# Altium PCB XEM7310_Breakout.PcbDoc (part 3 of 3)
Units mm, origin at the board's own origin, x right, y up, seen from the top; angles counter-clockwise.
Board outline 151.89 x 165.35 mm, 4 copper layers (Top, Ground Plane, Power Plane, Bottom), stack 1.562 mm thick; 68 components, 204 nets, 832 pads, 382 vias.
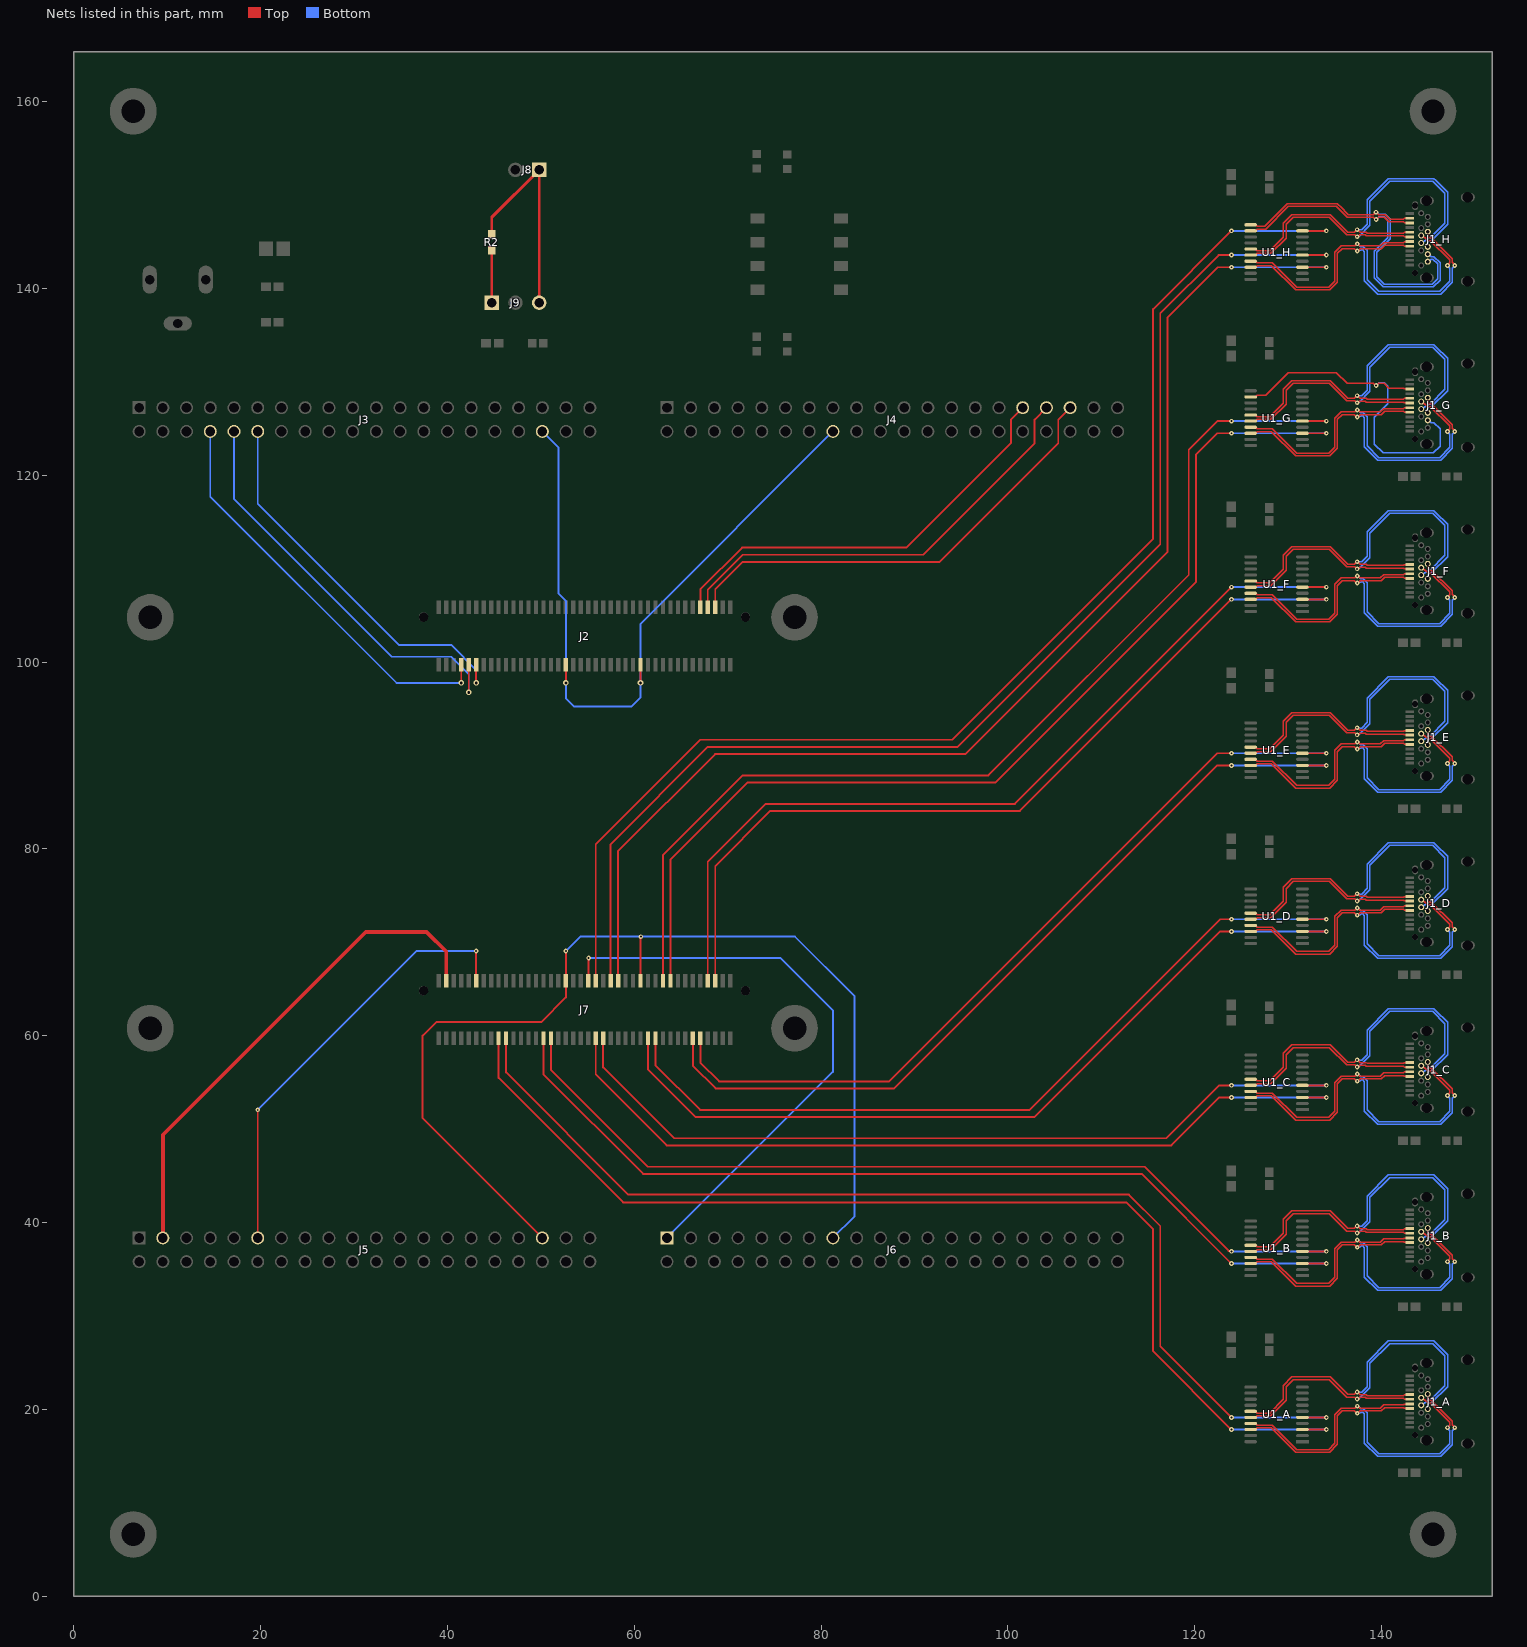
[diagram p5: the nets of this part, all layers, seen from the top]

## Via types
v1: diameter 0.508, hole 0.203, Top to Bottom, 190 vias
v2: diameter 0.61, hole 0.305, Top to Bottom, 154 vias
v3: diameter 0.813, hole 0.406, Top to Bottom, 38 vias

## Nets (pads, with @x,y where several pads share a name; then routed paths per layer and width w, separated by ;. In a path a pad name is that pad's centre, name@x,y a point inside that pad or via, vN(x,y) a via of type N, cw(c..) or ccw(c..) an arc to the next point about the centre after c; other vN are vias at no path point) (continued)
MISO_G_P: J1_G.A10 J1_G.B10 U1_G.12 | length 38.6
  Top w0.16: U1_G.12@126.003,128.414 126.559,128.414 126.74,128.596 127.632,128.596 130.06,131.024 135.179,131.024 136.34,129.863 139.152,129.863 139.375,129.639 v1(139.449,129.639) ; v1@139.451,129.652 139.526,129.652 139.738,129.864 140.309,129.864 140.808,129.364 142.384,129.364 142.475,129.274 143.047,129.274 J1_G.A10@143.063,129.258
  Bottom w0.16: v1(139.449,129.639) 139.489,129.639 139.758,129.908 140.295,129.908 140.67,129.533 140.67,127.684 139.239,126.253 139.239,123.364 140.195,122.408 145.575,122.408 146.304,123.138 146.304,124.982 145.635,125.652 145.361,125.652 145.105,125.908 J1_G.B10@144.973,125.908
MISO_H1: J7.43 U1_H.9 | length 137
  Top w0.203: J7.43@55.877,65.888 55.877,80.515 67.056,91.694 94.041,91.694 115.57,113.223 115.57,137.812 v1(123.952,146.194) ; U1_H.9@131.553,146.194 v1(134.112,146.194)
  Bottom w0.203: v1(123.952,146.194) v1(134.112,146.194)
MISO_H2: J6.01 J7.41 | length 62.7
  Top w0.203: J7.41@55.077,65.888 55.098,65.909 55.098,68.306 v1(55.118,68.326)
  Bottom w0.203: v1(55.118,68.326) 75.692,68.326 81.28,62.738 81.28,56.134 J6.01@63.5,38.354
MISO_H_N: J1_H.A11 J1_H.B11 U1_H.11 | length 37.8
  Top w0.16: U1_H.11@126.003,146.844 126.559,146.844 126.74,146.663 127.513,146.663 129.941,149.091 135.298,149.091 135.466,148.923 135.585,148.804 136.459,147.93 139.128,147.93 139.392,148.193 v1(139.432,148.193) ; v1@139.446,148.143 139.526,148.143 139.738,147.931 140.428,147.931 140.927,147.432 142.384,147.432 142.475,147.522 143.047,147.522 J1_H.A11@143.063,147.538
  Bottom w0.16: v1(139.432,148.193) 139.476,148.193 v1@139.526,148.143 ; v1@139.433,148.161 139.549,148.161 139.734,147.975 140.414,147.975 140.957,147.432 140.957,145.345 139.526,143.914 139.526,141.263 140.314,140.476 145.456,140.476 146.017,141.037 146.017,142.643 145.516,143.144 145.361,143.144 145.105,142.888 J1_H.B11@144.973,142.888
MISO_H_P: J1_H.A10 J1_H.B10 U1_H.12 | length 38.6
  Top w0.16: U1_H.12@126.003,146.194 126.559,146.194 126.74,146.376 127.632,146.376 130.06,148.804 135.179,148.804 136.34,147.643 139.152,147.643 139.375,147.419 v1(139.449,147.419) ; v1@139.451,147.432 139.526,147.432 139.738,147.644 140.309,147.644 140.808,147.144 142.384,147.144 142.475,147.054 143.047,147.054 J1_H.A10@143.063,147.038
  Bottom w0.16: v1(139.449,147.419) 139.489,147.419 139.758,147.688 140.295,147.688 140.67,147.313 140.67,145.464 139.239,144.033 139.239,141.144 140.195,140.188 145.575,140.188 146.304,140.918 146.304,142.762 145.635,143.432 145.361,143.432 145.105,143.688 J1_H.B10@144.973,143.688
MOSI_A: J7.20 U1_A.5 | length 116.9
  Top w0.203: J7.20@46.277,59.716 46.277,56.085 59.36,43.002 112.96,43.002 116.332,39.63 116.332,26.754 v1(123.952,19.134) ; U1_A.5@131.553,19.134 v1(134.112,19.134)
  Bottom w0.203: v1(123.952,19.134) v1(134.112,19.134)
MOSI_A_N: J1_A.A8 J1_A.B8 U1_A.15 | length 41.7
  Top w0.16: U1_A.15@126.003,19.784 126.559,19.784 126.74,19.603 128.044,19.603 129.507,21.065 129.507,22.547 130.431,23.471 134.557,23.471 136.43,21.598 137.08,21.598 137.345,21.863 137.484,21.863 137.77,21.577 138.396,21.577 138.501,21.472 142.384,21.472 142.475,21.562 143.047,21.562 J1_A.A8@143.063,21.578
  Bottom w0.16: v1(137.414,21.863) 137.443,21.834 137.883,21.834 138.481,22.432 138.481,25.048 140.763,27.33 145.635,27.33 145.838,27.127 147.099,25.866 147.099,22.416 145.365,20.682 145.13,20.682 144.947,20.499 144.947,20.054 J1_A.B8@144.973,20.028
MOSI_A_P: J1_A.A7 J1_A.B7 U1_A.16 | length 41.2
  Top w0.16: U1_A.16@126.003,19.134 126.559,19.134 126.74,19.316 128.163,19.316 129.794,20.946 129.794,22.428 130.55,23.184 134.439,23.184 136.312,21.311 137.135,21.311 137.344,21.101 137.509,21.101 137.647,21.239 137.655,21.239 137.706,21.29 138.277,21.29 138.382,21.184 142.384,21.184 142.475,21.094 143.047,21.094 J1_A.A7@143.063,21.078
  Bottom w0.16: v1(137.415,21.101) 137.509,21.101 137.634,21.227 137.681,21.227 138.768,22.313 138.768,24.929 140.882,27.043 145.516,27.043 146.812,25.747 146.812,22.535 145.246,20.969 145.011,20.969 144.729,20.687 144.665,20.687 144.406,20.428 J1_A.B7@144.273,20.428
MOSI_B: J7.32 U1_B.5 | length 97
  Top w0.203: J7.32@51.077,59.716 51.077,56.365 61.468,45.974 114.653,45.974 123.654,36.973 123.894,36.973 v1(123.952,36.914) ; U1_B.5@131.553,36.914 v1(134.112,36.914)
  Bottom w0.203: v1(123.952,36.914) v1(134.112,36.914)
MOSI_B_N: J1_B.A8 J1_B.B8 U1_B.15 | length 41.7
  Top w0.16: U1_B.15@126.003,37.564 126.559,37.564 126.74,37.383 128.044,37.383 129.507,38.845 129.507,40.327 130.431,41.251 134.557,41.251 136.43,39.378 137.08,39.378 137.345,39.643 137.484,39.643 137.77,39.357 138.396,39.357 138.501,39.252 142.384,39.252 142.475,39.342 143.047,39.342 J1_B.A8@143.063,39.358
  Bottom w0.16: v1(137.414,39.643) 137.443,39.614 137.883,39.614 138.481,40.212 138.481,42.828 140.763,45.11 145.635,45.11 145.838,44.907 147.099,43.646 147.099,40.196 145.365,38.462 145.13,38.462 144.947,38.279 144.947,37.834 J1_B.B8@144.973,37.808
MOSI_B_P: J1_B.A7 J1_B.B7 U1_B.16 | length 41.2
  Top w0.16: U1_B.16@126.003,36.914 126.559,36.914 126.74,37.096 128.163,37.096 129.794,38.726 129.794,40.208 130.55,40.964 134.439,40.964 136.312,39.091 137.135,39.091 137.344,38.881 137.509,38.881 137.647,39.019 137.655,39.019 137.706,39.07 138.277,39.07 138.382,38.964 142.384,38.964 142.475,38.874 143.047,38.874 J1_B.A7@143.063,38.858
  Bottom w0.16: v1(137.415,38.881) 137.509,38.881 137.634,39.007 137.681,39.007 138.768,40.093 138.768,42.709 140.882,44.823 145.516,44.823 146.812,43.527 146.812,40.315 145.246,38.749 145.011,38.749 144.729,38.467 144.665,38.467 144.406,38.208 J1_B.B7@144.273,38.208
MOSI_C: J7.46 U1_C.5 | length 88.6
  Top w0.203: J7.46@56.677,59.716 56.677,56.607 64.262,49.022 116.985,49.022 122.658,54.694 v1(123.952,54.694) ; U1_C.5@131.553,54.694 v1(134.112,54.694)
  Bottom w0.203: v1(123.952,54.694) v1(134.112,54.694)
MOSI_C_N: J1_C.A8 J1_C.B8 U1_C.15 | length 41.7
  Top w0.16: U1_C.15@126.003,55.344 126.559,55.344 126.74,55.163 128.044,55.163 129.507,56.625 129.507,58.107 130.431,59.031 134.557,59.031 136.43,57.158 137.08,57.158 137.345,57.423 137.484,57.423 137.77,57.137 138.396,57.137 138.501,57.032 142.384,57.032 142.475,57.122 143.047,57.122 J1_C.A8@143.063,57.138
  Bottom w0.16: v1(137.414,57.423) 137.443,57.394 137.883,57.394 138.481,57.992 138.481,60.608 140.763,62.89 145.635,62.89 145.838,62.687 147.099,61.426 147.099,57.976 145.365,56.242 145.13,56.242 144.947,56.059 144.947,55.614 J1_C.B8@144.973,55.588
MOSI_C_P: J1_C.A7 J1_C.B7 U1_C.16 | length 41.2
  Top w0.16: U1_C.16@126.003,54.694 126.559,54.694 126.74,54.876 128.163,54.876 129.794,56.506 129.794,57.988 130.55,58.744 134.439,58.744 136.312,56.871 137.135,56.871 137.344,56.661 137.509,56.661 137.647,56.799 137.655,56.799 137.706,56.85 138.277,56.85 138.382,56.744 142.384,56.744 142.475,56.654 143.047,56.654 J1_C.A7@143.063,56.638
  Bottom w0.16: v1(137.415,56.661) 137.509,56.661 137.634,56.787 137.681,56.787 138.768,57.873 138.768,60.489 140.882,62.603 145.516,62.603 146.812,61.307 146.812,58.095 145.246,56.529 145.011,56.529 144.729,56.247 144.665,56.247 144.406,55.988 J1_C.B7@144.273,55.988
MOSI_D: J7.60 U1_D.5 | length 87.7
  Top w0.203: J7.60@62.277,59.716 62.277,56.849 67.056,52.07 102.331,52.07 122.735,72.474 v1(123.952,72.474) ; U1_D.5@131.553,72.474 v1(134.112,72.474)
  Bottom w0.203: v1(123.952,72.474) v1(134.112,72.474)
MOSI_D_N: J1_D.A8 J1_D.B8 U1_D.15 | length 41.7
  Top w0.16: U1_D.15@126.003,73.124 126.559,73.124 126.74,72.943 128.044,72.943 129.507,74.405 129.507,75.887 130.431,76.811 134.557,76.811 136.43,74.938 137.08,74.938 137.345,75.203 137.484,75.203 137.77,74.917 138.396,74.917 138.501,74.812 142.384,74.812 142.475,74.902 143.047,74.902 J1_D.A8@143.063,74.918
  Bottom w0.16: v1(137.414,75.203) 137.443,75.174 137.883,75.174 138.481,75.772 138.481,78.388 140.763,80.67 145.635,80.67 145.838,80.467 147.099,79.206 147.099,75.756 145.365,74.022 145.13,74.022 144.947,73.839 144.947,73.394 J1_D.B8@144.973,73.368
MOSI_D_P: J1_D.A7 J1_D.B7 U1_D.16 | length 41.2
  Top w0.16: U1_D.16@126.003,72.474 126.559,72.474 126.74,72.656 128.163,72.656 129.794,74.286 129.794,75.768 130.55,76.524 134.439,76.524 136.312,74.651 137.135,74.651 137.344,74.441 137.509,74.441 137.647,74.579 137.655,74.579 137.706,74.63 138.277,74.63 138.382,74.524 142.384,74.524 142.475,74.434 143.047,74.434 J1_D.A7@143.063,74.418
  Bottom w0.16: v1(137.415,74.441) 137.509,74.441 137.634,74.567 137.681,74.567 138.768,75.653 138.768,78.269 140.882,80.383 145.516,80.383 146.812,79.087 146.812,75.875 145.246,74.309 145.011,74.309 144.729,74.027 144.665,74.027 144.406,73.768 J1_D.B7@144.273,73.768
MOSI_E: J7.72 U1_E.5 | length 87.6
  Top w0.203: J7.72@67.077,59.716 67.077,57.129 69.088,55.118 87.295,55.118 122.431,90.254 v1(123.952,90.254) ; U1_E.5@131.553,90.254 v1(134.112,90.254)
  Bottom w0.203: v1(123.952,90.254) v1(134.112,90.254)
MOSI_E_N: J1_E.A8 J1_E.B8 U1_E.15 | length 41.7
  Top w0.16: U1_E.15@126.003,90.904 126.559,90.904 126.74,90.723 128.044,90.723 129.507,92.185 129.507,93.667 130.431,94.591 134.557,94.591 136.43,92.718 137.08,92.718 137.345,92.983 137.484,92.983 137.77,92.697 138.396,92.697 138.501,92.592 142.384,92.592 142.475,92.682 143.047,92.682 J1_E.A8@143.063,92.698
  Bottom w0.16: v1(137.414,92.983) 137.443,92.954 137.883,92.954 138.481,93.552 138.481,96.168 140.763,98.45 145.635,98.45 145.838,98.247 147.099,96.986 147.099,93.536 145.365,91.802 145.13,91.802 144.947,91.619 144.947,91.174 J1_E.B8@144.973,91.148
MOSI_E_P: J1_E.A7 J1_E.B7 U1_E.16 | length 41.2
  Top w0.16: U1_E.16@126.003,90.254 126.559,90.254 126.74,90.436 128.163,90.436 129.794,92.066 129.794,93.548 130.55,94.304 134.439,94.304 136.312,92.431 137.135,92.431 137.344,92.221 137.509,92.221 137.647,92.359 137.655,92.359 137.706,92.41 138.277,92.41 138.382,92.304 142.384,92.304 142.475,92.214 143.047,92.214 J1_E.A7@143.063,92.198
  Bottom w0.16: v1(137.415,92.221) 137.509,92.221 137.634,92.347 137.681,92.347 138.768,93.433 138.768,96.049 140.882,98.163 145.516,98.163 146.812,96.867 146.812,93.655 145.246,92.089 145.011,92.089 144.729,91.807 144.665,91.807 144.406,91.548 J1_E.B7@144.273,91.548
MOSI_F: J7.73 U1_F.5 | length 93.7
  Top w0.203: J7.73@67.877,65.888 67.877,78.63 74.083,84.836 100.754,84.836 v1(123.952,108.034) ; U1_F.5@131.553,108.034 v1(134.112,108.034)
  Bottom w0.203: v1(123.952,108.034) v1(134.112,108.034)
MOSI_F_N: J1_F.A8 J1_F.B8 U1_F.15 | length 41.7
  Top w0.16: U1_F.15@126.003,108.684 126.559,108.684 126.74,108.503 128.044,108.503 129.507,109.965 129.507,111.447 130.431,112.371 134.557,112.371 136.43,110.498 137.08,110.498 137.345,110.763 137.484,110.763 137.77,110.477 138.396,110.477 138.501,110.372 142.384,110.372 142.475,110.462 143.047,110.462 J1_F.A8@143.063,110.478
  Bottom w0.16: v1(137.414,110.763) 137.443,110.734 137.883,110.734 138.481,111.332 138.481,113.948 140.763,116.23 145.635,116.23 145.838,116.027 147.099,114.766 147.099,111.316 145.365,109.582 145.13,109.582 144.947,109.399 144.947,108.954 J1_F.B8@144.973,108.928
MOSI_F_P: J1_F.A7 J1_F.B7 U1_F.16 | length 41.2
  Top w0.16: U1_F.16@126.003,108.034 126.559,108.034 126.74,108.216 128.163,108.216 129.794,109.846 129.794,111.328 130.55,112.084 134.439,112.084 136.312,110.211 137.135,110.211 137.344,110.001 137.509,110.001 137.647,110.139 137.655,110.139 137.706,110.19 138.277,110.19 138.382,110.084 142.384,110.084 142.475,109.994 143.047,109.994 J1_F.A7@143.063,109.978
  Bottom w0.16: v1(137.415,110.001) 137.509,110.001 137.634,110.127 137.681,110.127 138.768,111.213 138.768,113.829 140.882,115.943 145.516,115.943 146.812,114.647 146.812,111.435 145.246,109.869 145.011,109.869 144.729,109.587 144.665,109.587 144.406,109.328 J1_F.B7@144.273,109.328
MOSI_G: J7.61 U1_G.5 | length 114.1
  Top w0.203: J7.61@63.077,65.888 63.077,79.333 71.628,87.884 97.923,87.884 119.38,109.341 119.38,122.746 122.449,125.814 v1(123.952,125.814) ; U1_G.5@131.553,125.814 v1(134.112,125.814)
  Bottom w0.203: v1(123.952,125.814) v1(134.112,125.814)
MOSI_G_N: J1_G.A8 J1_G.B8 U1_G.15 | length 41.7
  Top w0.16: U1_G.15@126.003,126.464 126.559,126.464 126.74,126.283 128.044,126.283 129.507,127.745 129.507,129.227 130.431,130.151 134.557,130.151 136.43,128.278 137.08,128.278 137.345,128.543 137.484,128.543 137.77,128.257 138.396,128.257 138.501,128.152 142.384,128.152 142.475,128.242 143.047,128.242 J1_G.A8@143.063,128.258
  Bottom w0.16: v1(137.414,128.543) 137.443,128.514 137.883,128.514 138.481,129.112 138.481,131.728 140.763,134.01 145.635,134.01 145.838,133.807 147.099,132.546 147.099,129.096 145.365,127.362 145.13,127.362 144.947,127.179 144.947,126.734 J1_G.B8@144.973,126.708
MOSI_G_P: J1_G.A7 J1_G.B7 U1_G.16 | length 41.2
  Top w0.16: U1_G.16@126.003,125.814 126.559,125.814 126.74,125.996 128.163,125.996 129.794,127.626 129.794,129.108 130.55,129.864 134.439,129.864 136.312,127.991 137.135,127.991 137.344,127.781 137.509,127.781 137.647,127.919 137.655,127.919 137.706,127.97 138.277,127.97 138.382,127.864 142.384,127.864 142.475,127.774 143.047,127.774 J1_G.A7@143.063,127.758
  Bottom w0.16: v1(137.415,127.781) 137.509,127.781 137.634,127.907 137.681,127.907 138.768,128.993 138.768,131.609 140.882,133.723 145.516,133.723 146.812,132.427 146.812,129.215 145.246,127.649 145.011,127.649 144.729,127.367 144.665,127.367 144.406,127.108 J1_G.B7@144.273,127.108
MOSI_H: J7.47 U1_H.5 | length 134.4
  Top w0.203: J7.47@57.477,65.888 57.477,80.512 67.897,90.932 94.643,90.932 116.332,112.621 116.332,137.35 122.576,143.594 v1(123.952,143.594) ; U1_H.5@131.553,143.594 v1(134.112,143.594)
  Bottom w0.203: v1(123.952,143.594) v1(134.112,143.594)
MOSI_H_N: J1_H.A8 J1_H.B8 U1_H.15 | length 41.7
  Top w0.16: U1_H.15@126.003,144.244 126.559,144.244 126.74,144.063 128.044,144.063 129.507,145.525 129.507,147.007 130.431,147.931 134.557,147.931 136.43,146.058 137.08,146.058 137.345,146.323 137.484,146.323 137.77,146.037 138.396,146.037 138.501,145.932 142.384,145.932 142.475,146.022 143.047,146.022 J1_H.A8@143.063,146.038
  Bottom w0.16: v1(137.414,146.323) 137.443,146.294 137.883,146.294 138.481,146.892 138.481,149.508 140.763,151.79 145.635,151.79 145.838,151.587 147.099,150.326 147.099,146.876 145.365,145.142 145.13,145.142 144.947,144.959 144.947,144.514 J1_H.B8@144.973,144.488
MOSI_H_P: J1_H.A7 J1_H.B7 U1_H.16 | length 41.2
  Top w0.16: U1_H.16@126.003,143.594 126.559,143.594 126.74,143.776 128.163,143.776 129.794,145.406 129.794,146.888 130.55,147.644 134.439,147.644 136.312,145.771 137.135,145.771 137.344,145.561 137.509,145.561 137.647,145.699 137.655,145.699 137.706,145.75 138.277,145.75 138.382,145.644 142.384,145.644 142.475,145.554 143.047,145.554 J1_H.A7@143.063,145.538
  Bottom w0.16: v1(137.415,145.561) 137.509,145.561 137.634,145.687 137.681,145.687 138.768,146.773 138.768,149.389 140.882,151.503 145.516,151.503 146.812,150.207 146.812,146.995 145.246,145.429 145.011,145.429 144.729,145.147 144.665,145.147 144.406,144.888 J1_H.B7@144.273,144.888
NetJ8_1: J8.1 J9.3 R2.2 | length 23.2
  Top w0.305: R2.2@44.742,145.825 44.742,147.642 J8.1@49.822,152.722 J9.3@49.822,138.498
NetJ9_1: J9.1 R2.1 | length 5.6
  Top w0.305: J9.1@44.742,138.498 R2.1@44.742,144.125
SCLK_A: J7.18 U1_A.3 | length 118.7
  Top w0.203: J7.18@45.477,59.716 45.477,55.488 58.801,42.164 112.663,42.164 115.57,39.257 115.57,26.216 v1(123.952,17.834) ; U1_A.3@131.553,17.834 v1(134.112,17.834)
  Bottom w0.203: v1(123.952,17.834) v1(134.112,17.834)
SCLK_A_N: J1_A.A6 J1_A.B6 U1_A.17 | length 43.1
  Top w0.16: U1_A.17@126.003,18.484 126.559,18.484 126.74,18.303 128.336,18.303 130.942,15.697 134.354,15.697 135.011,16.353 135.011,19.435 135.701,20.124 137.135,20.124 137.35,20.339 137.494,20.339 137.706,20.127 139.9,20.127 140.244,20.472 142.384,20.472 142.475,20.562 143.047,20.562 J1_A.A6@143.063,20.578 ; J1_A.B6@144.273,21.228 144.406,21.228 144.665,20.969 144.729,20.969 145.011,20.687 145.246,20.687 147.311,18.622 147.311,18.32 147.091,18.1 v1(147.091,18.033)
  Bottom w0.16: v1(137.418,20.339) 137.512,20.339 137.805,20.046 138.065,20.046 138.481,19.63 138.481,16.497 139.738,15.24 146.236,15.24 147.333,16.337 147.333,17.73 147.091,17.972 v1(147.091,18.033)
SCLK_A_P: J1_A.A5 J1_A.B5 U1_A.18 | length 43.7
  Top w0.16: U1_A.18@126.003,17.834 126.559,17.834 126.74,18.016 128.217,18.016 130.823,15.41 134.473,15.41 135.298,16.234 135.298,19.316 135.82,19.837 137.088,19.837 137.349,19.577 v1(137.42,19.577) ; v1@137.42,19.628 137.539,19.628 137.751,19.84 140.019,19.84 140.363,20.184 142.384,20.184 142.475,20.094 143.047,20.094 J1_A.A5@143.063,20.078 ; J1_A.B5@144.973,21.628 144.947,21.602 144.947,21.157 145.13,20.974 145.365,20.974 147.598,18.741 147.598,18.357 147.861,18.094 v1(147.861,18.033)
  Bottom w0.16: v1(137.42,19.577) 137.486,19.644 137.794,19.644 137.861,19.711 137.994,19.711 138.194,19.511 138.194,16.379 139.62,14.953 146.355,14.953 147.62,16.218 147.62,17.73 147.861,17.971 v1(147.861,18.033)
SCLK_B: J7.30 U1_B.3 | length 98.6
  Top w0.203: J7.30@50.277,59.716 50.277,55.895 60.96,45.212 114.354,45.212 v1(123.952,35.614) ; U1_B.3@131.553,35.614 v1(134.112,35.614)
  Bottom w0.203: v1(123.952,35.614) v1(134.112,35.614)
SCLK_B_N: J1_B.A6 J1_B.B6 U1_B.17 | length 43.1
  Top w0.16: U1_B.17@126.003,36.264 126.559,36.264 126.74,36.083 128.336,36.083 130.942,33.477 134.354,33.477 135.011,34.133 135.011,37.215 135.701,37.904 137.135,37.904 137.35,38.119 137.494,38.119 137.706,37.907 139.9,37.907 140.244,38.252 142.384,38.252 142.475,38.342 143.047,38.342 J1_B.A6@143.063,38.358 ; J1_B.B6@144.273,39.008 144.406,39.008 144.665,38.749 144.729,38.749 145.011,38.467 145.246,38.467 147.311,36.402 147.311,36.1 147.091,35.88 v1(147.091,35.813)
  Bottom w0.16: v1(137.418,38.119) 137.512,38.119 137.805,37.826 138.065,37.826 138.481,37.41 138.481,34.277 139.738,33.02 146.236,33.02 147.333,34.117 147.333,35.51 147.091,35.752 v1(147.091,35.813)
SCLK_B_P: J1_B.A5 J1_B.B5 U1_B.18 | length 43.7
  Top w0.16: U1_B.18@126.003,35.614 126.559,35.614 126.74,35.796 128.217,35.796 130.823,33.19 134.473,33.19 135.298,34.014 135.298,37.096 135.82,37.617 137.088,37.617 137.349,37.357 v1(137.42,37.357) ; v1@137.42,37.408 137.539,37.408 137.751,37.62 140.019,37.62 140.363,37.964 142.384,37.964 142.475,37.874 143.047,37.874 J1_B.A5@143.063,37.858 ; J1_B.B5@144.973,39.408 144.947,39.382 144.947,38.937 145.13,38.754 145.365,38.754 147.598,36.521 147.598,36.137 147.861,35.874 v1(147.861,35.813)
  Bottom w0.16: v1(137.42,37.357) 137.486,37.424 137.794,37.424 137.861,37.491 137.994,37.491 138.194,37.291 138.194,34.159 139.62,32.733 146.355,32.733 147.62,33.998 147.62,35.51 147.861,35.751 v1(147.861,35.813)
SCLK_C: J7.44 U1_C.3 | length 89.9
  Top w0.203: J7.44@55.877,59.716 55.877,55.854 63.471,48.26 117.523,48.26 122.658,53.394 v1(123.952,53.394) ; U1_C.3@131.553,53.394 v1(134.112,53.394)
  Bottom w0.203: v1(123.952,53.394) v1(134.112,53.394)
SCLK_C_N: J1_C.A6 J1_C.B6 U1_C.17 | length 43.1
  Top w0.16: U1_C.17@126.003,54.044 126.559,54.044 126.74,53.863 128.336,53.863 130.942,51.257 134.354,51.257 135.011,51.913 135.011,54.995 135.701,55.684 137.135,55.684 137.35,55.899 137.494,55.899 137.706,55.687 139.9,55.687 140.244,56.032 142.384,56.032 142.475,56.122 143.047,56.122 J1_C.A6@143.063,56.138 ; J1_C.B6@144.273,56.788 144.406,56.788 144.665,56.529 144.729,56.529 145.011,56.247 145.246,56.247 147.311,54.182 147.311,53.88 147.091,53.66 v1(147.091,53.593)
  Bottom w0.16: v1(137.418,55.899) 137.512,55.899 137.805,55.606 138.065,55.606 138.481,55.19 138.481,52.057 139.738,50.8 146.236,50.8 147.333,51.897 147.333,53.29 147.091,53.532 v1(147.091,53.593)
SCLK_C_P: J1_C.A5 J1_C.B5 U1_C.18 | length 43.7
  Top w0.16: U1_C.18@126.003,53.394 126.559,53.394 126.74,53.576 128.217,53.576 130.823,50.97 134.473,50.97 135.298,51.794 135.298,54.876 135.82,55.397 137.088,55.397 137.349,55.137 v1(137.42,55.137) ; v1@137.42,55.188 137.539,55.188 137.751,55.4 140.019,55.4 140.363,55.744 142.384,55.744 142.475,55.654 143.047,55.654 J1_C.A5@143.063,55.638 ; J1_C.B5@144.973,57.188 144.947,57.162 144.947,56.717 145.13,56.534 145.365,56.534 147.598,54.301 147.598,53.917 147.861,53.654 v1(147.861,53.593)
  Bottom w0.16: v1(137.42,55.137) 137.486,55.204 137.794,55.204 137.861,55.271 137.994,55.271 138.194,55.071 138.194,51.939 139.62,50.513 146.355,50.513 147.62,51.778 147.62,53.29 147.861,53.531 v1(147.861,53.593)
SCLK_D: J7.58 U1_D.3 | length 88.9
  Top w0.203: J7.58@61.477,59.716 61.477,56.379 66.548,51.308 102.869,51.308 122.735,71.174 v1(123.952,71.174) ; U1_D.3@131.553,71.174 v1(134.112,71.174)
  Bottom w0.203: v1(123.952,71.174) v1(134.112,71.174)
SCLK_D_N: J1_D.A6 J1_D.B6 U1_D.17 | length 43.1
  Top w0.16: U1_D.17@126.003,71.824 126.559,71.824 126.74,71.643 128.336,71.643 130.942,69.037 134.354,69.037 135.011,69.693 135.011,72.775 135.701,73.464 137.135,73.464 137.35,73.679 137.494,73.679 137.706,73.467 139.9,73.467 140.244,73.812 142.384,73.812 142.475,73.902 143.047,73.902 J1_D.A6@143.063,73.918 ; J1_D.B6@144.273,74.568 144.406,74.568 144.665,74.309 144.729,74.309 145.011,74.027 145.246,74.027 147.311,71.962 147.311,71.66 147.091,71.44 v1(147.091,71.373)
  Bottom w0.16: v1(137.418,73.679) 137.512,73.679 137.805,73.386 138.065,73.386 138.481,72.97 138.481,69.837 139.738,68.58 146.236,68.58 147.333,69.677 147.333,71.07 147.091,71.312 v1(147.091,71.373)
SCLK_D_P: J1_D.A5 J1_D.B5 U1_D.18 | length 43.7
  Top w0.16: U1_D.18@126.003,71.174 126.559,71.174 126.74,71.356 128.217,71.356 130.823,68.75 134.473,68.75 135.298,69.574 135.298,72.656 135.82,73.177 137.088,73.177 137.349,72.917 v1(137.42,72.917) ; v1@137.42,72.968 137.539,72.968 137.751,73.18 140.019,73.18 140.363,73.524 142.384,73.524 142.475,73.434 143.047,73.434 J1_D.A5@143.063,73.418 ; J1_D.B5@144.973,74.968 144.947,74.942 144.947,74.497 145.13,74.314 145.365,74.314 147.598,72.081 147.598,71.697 147.861,71.434 v1(147.861,71.373)
  Bottom w0.16: v1(137.42,72.917) 137.486,72.984 137.794,72.984 137.861,73.051 137.994,73.051 138.194,72.851 138.194,69.719 139.62,68.293 146.355,68.293 147.62,69.558 147.62,71.07 147.861,71.311 v1(147.861,71.373)
SCLK_E: J7.70 U1_E.3 | length 88.7
  Top w0.203: J7.70@66.277,59.716 66.277,56.794 68.715,54.356 87.833,54.356 122.431,88.954 v1(123.952,88.954) ; U1_E.3@131.553,88.954 v1(134.112,88.954)
  Bottom w0.203: v1(123.952,88.954) v1(134.112,88.954)
SCLK_E_N: J1_E.A6 J1_E.B6 U1_E.17 | length 43.1
  Top w0.16: U1_E.17@126.003,89.604 126.559,89.604 126.74,89.423 128.336,89.423 130.942,86.817 134.354,86.817 135.011,87.473 135.011,90.555 135.701,91.244 137.135,91.244 137.35,91.459 137.494,91.459 137.706,91.247 139.9,91.247 140.244,91.592 142.384,91.592 142.475,91.682 143.047,91.682 J1_E.A6@143.063,91.698 ; J1_E.B6@144.273,92.348 144.406,92.348 144.665,92.089 144.729,92.089 145.011,91.807 145.246,91.807 147.311,89.742 147.311,89.44 147.091,89.22 v1(147.091,89.153)
  Bottom w0.16: v1(137.418,91.459) 137.512,91.459 137.805,91.166 138.065,91.166 138.481,90.75 138.481,87.617 139.738,86.36 146.236,86.36 147.333,87.457 147.333,88.85 147.091,89.092 v1(147.091,89.153)
SCLK_E_P: J1_E.A5 J1_E.B5 U1_E.18 | length 43.7
  Top w0.16: U1_E.18@126.003,88.954 126.559,88.954 126.74,89.136 128.217,89.136 130.823,86.53 134.473,86.53 135.298,87.354 135.298,90.436 135.82,90.957 137.088,90.957 137.349,90.697 v1(137.42,90.697) ; v1@137.42,90.748 137.539,90.748 137.751,90.96 140.019,90.96 140.363,91.304 142.384,91.304 142.475,91.214 143.047,91.214 J1_E.A5@143.063,91.198 ; J1_E.B5@144.973,92.748 144.947,92.722 144.947,92.277 145.13,92.094 145.365,92.094 147.598,89.861 147.598,89.477 147.861,89.214 v1(147.861,89.153)
  Bottom w0.16: v1(137.42,90.697) 137.486,90.764 137.794,90.764 137.861,90.831 137.994,90.831 138.194,90.631 138.194,87.499 139.62,86.073 146.355,86.073 147.62,87.338 147.62,88.85 147.861,89.091 v1(147.861,89.153)
SCLK_F: J7.75 U1_F.3 | length 92.1
  Top w0.203: J7.75@68.677,65.888 68.677,78.16 74.591,84.074 101.292,84.074 v1(123.952,106.734) ; U1_F.3@131.553,106.734 v1(134.112,106.734)
  Bottom w0.203: v1(123.952,106.734) v1(134.112,106.734)
SCLK_F_N: J1_F.A6 J1_F.B6 U1_F.17 | length 43.1
  Top w0.16: U1_F.17@126.003,107.384 126.559,107.384 126.74,107.203 128.336,107.203 130.942,104.597 134.354,104.597 135.011,105.253 135.011,108.335 135.701,109.024 137.135,109.024 137.35,109.239 137.494,109.239 137.706,109.027 139.9,109.027 140.244,109.372 142.384,109.372 142.475,109.462 143.047,109.462 J1_F.A6@143.063,109.478 ; J1_F.B6@144.273,110.128 144.406,110.128 144.665,109.869 144.729,109.869 145.011,109.587 145.246,109.587 147.311,107.522 147.311,107.22 147.091,107 v1(147.091,106.933)
  Bottom w0.16: v1(137.418,109.239) 137.512,109.239 137.805,108.946 138.065,108.946 138.481,108.53 138.481,105.397 139.738,104.14 146.236,104.14 147.333,105.237 147.333,106.63 147.091,106.872 v1(147.091,106.933)
SCLK_F_P: J1_F.A5 J1_F.B5 U1_F.18 | length 43.7
  Top w0.16: U1_F.18@126.003,106.734 126.559,106.734 126.74,106.916 128.217,106.916 130.823,104.31 134.473,104.31 135.298,105.134 135.298,108.216 135.82,108.737 137.088,108.737 137.349,108.477 v1(137.42,108.477) ; v1@137.42,108.528 137.539,108.528 137.751,108.74 140.019,108.74 140.363,109.084 142.384,109.084 142.475,108.994 143.047,108.994 J1_F.A5@143.063,108.978 ; J1_F.B5@144.973,110.528 144.947,110.502 144.947,110.057 145.13,109.874 145.365,109.874 147.598,107.641 147.598,107.257 147.861,106.994 v1(147.861,106.933)
  Bottom w0.16: v1(137.42,108.477) 137.486,108.544 137.794,108.544 137.861,108.611 137.994,108.611 138.194,108.411 138.194,105.279 139.62,103.853 146.355,103.853 147.62,105.118 147.62,106.63 147.861,106.871 v1(147.861,106.933)
SCLK_G: J7.63 U1_G.3 | length 112.6
  Top w0.203: J7.63@63.877,65.888 63.877,78.825 72.174,87.122 98.692,87.122 120.142,108.572 120.142,122.208 122.449,124.514 v1(123.952,124.514) ; U1_G.3@131.553,124.514 v1(134.112,124.514)
  Bottom w0.203: v1(123.952,124.514) v1(134.112,124.514)
SCLK_G_N: J1_G.A6 J1_G.B6 U1_G.17 | length 43.1
  Top w0.16: U1_G.17@126.003,125.164 126.559,125.164 126.74,124.983 128.336,124.983 130.942,122.377 134.354,122.377 135.011,123.033 135.011,126.115 135.701,126.804 137.135,126.804 137.35,127.019 137.494,127.019 137.706,126.807 139.9,126.807 140.244,127.152 142.384,127.152 142.475,127.242 143.047,127.242 J1_G.A6@143.063,127.258 ; J1_G.B6@144.273,127.908 144.406,127.908 144.665,127.649 144.729,127.649 145.011,127.367 145.246,127.367 147.311,125.302 147.311,125 147.091,124.78 v1(147.091,124.713)
  Bottom w0.16: v1(137.418,127.019) 137.512,127.019 137.805,126.726 138.065,126.726 138.481,126.31 138.481,123.177 139.738,121.92 146.236,121.92 147.333,123.017 147.333,124.41 147.091,124.652 v1(147.091,124.713)
SCLK_G_P: J1_G.A5 J1_G.B5 U1_G.18 | length 43.7
  Top w0.16: U1_G.18@126.003,124.514 126.559,124.514 126.74,124.696 128.217,124.696 130.823,122.09 134.473,122.09 135.298,122.914 135.298,125.996 135.82,126.517 137.088,126.517 137.349,126.257 v1(137.42,126.257) ; v1@137.42,126.308 137.539,126.308 137.751,126.52 140.019,126.52 140.363,126.864 142.384,126.864 142.475,126.774 143.047,126.774 J1_G.A5@143.063,126.758 ; J1_G.B5@144.973,128.308 144.947,128.282 144.947,127.837 145.13,127.654 145.365,127.654 147.598,125.421 147.598,125.037 147.861,124.774 v1(147.861,124.713)
  Bottom w0.16: v1(137.42,126.257) 137.486,126.324 137.794,126.324 137.861,126.391 137.994,126.391 138.194,126.191 138.194,123.059 139.62,121.633 146.355,121.633 147.62,122.898 147.62,124.41 147.861,124.651 v1(147.861,124.713)
SCLK_H: J7.49 U1_H.3 | length 132.9
  Top w0.203: J7.49@58.277,65.888 58.277,79.788 68.659,90.17 95.466,90.17 117.094,111.798 117.094,136.906 122.482,142.294 v1(123.952,142.294) ; U1_H.3@131.553,142.294 v1(134.112,142.294)
  Bottom w0.203: v1(123.952,142.294) v1(134.112,142.294)
SCLK_H_N: J1_H.A6 J1_H.B6 U1_H.17 | length 43.1
  Top w0.16: U1_H.17@126.003,142.944 126.559,142.944 126.74,142.763 128.336,142.763 130.942,140.157 134.354,140.157 135.011,140.813 135.011,143.895 135.701,144.584 137.135,144.584 137.35,144.799 137.494,144.799 137.706,144.587 139.9,144.587 140.244,144.932 142.384,144.932 142.475,145.022 143.047,145.022 J1_H.A6@143.063,145.038 ; J1_H.B6@144.273,145.688 144.406,145.688 144.665,145.429 144.729,145.429 145.011,145.147 145.246,145.147 147.311,143.082 147.311,142.78 147.091,142.56 v1(147.091,142.493)
  Bottom w0.16: v1(137.418,144.799) 137.512,144.799 137.805,144.506 138.065,144.506 138.481,144.09 138.481,140.957 139.738,139.7 146.236,139.7 147.333,140.797 147.333,142.19 147.091,142.432 v1(147.091,142.493)
SCLK_H_P: J1_H.A5 J1_H.B5 U1_H.18 | length 43.7
  Top w0.16: U1_H.18@126.003,142.294 126.559,142.294 126.74,142.476 128.217,142.476 130.823,139.87 134.473,139.87 135.298,140.694 135.298,143.776 135.82,144.297 137.088,144.297 137.349,144.037 v1(137.42,144.037) ; v1@137.42,144.088 137.539,144.088 137.751,144.3 140.019,144.3 140.363,144.644 142.384,144.644 142.475,144.554 143.047,144.554 J1_H.A5@143.063,144.538 ; J1_H.B5@144.973,146.088 144.947,146.062 144.947,145.617 145.13,145.434 145.365,145.434 147.598,143.201 147.598,142.817 147.861,142.554 v1(147.861,142.493)
  Bottom w0.16: v1(137.42,144.037) 137.486,144.104 137.794,144.104 137.861,144.171 137.994,144.171 138.194,143.971 138.194,140.839 139.62,139.413 146.355,139.413 147.62,140.678 147.62,142.19 147.861,142.431 v1(147.861,142.493)
status_led_1: J2.75 J4.35 | length 49.5
  Top w0.203: J2.75@68.677,105.888 68.677,107.793 71.628,110.744 92.71,110.744 105.41,123.444 105.41,125.984 J4.35@106.68,127.254
status_led_2: J2.73 J4.33 | length 47.7
  Top w0.203: J2.73@67.877,105.888 67.877,107.755 71.628,111.506 90.932,111.506 102.87,123.444 102.87,125.984 J4.33@104.14,127.254
status_led_3: J2.71 J4.31 | length 46
  Top w0.203: J2.71@67.077,105.888 67.077,107.793 71.552,112.268 89.154,112.268 100.33,123.444 100.33,125.984 J4.31@101.6,127.254
SYS_CLK_MC1: J2.08 J3.08 | length 44
  Top w0.203: v2(41.477,97.79) J2.08@41.477,99.716
  Bottom w0.203: J3.08@14.605,124.714 14.605,117.729 34.544,97.79 v2(41.477,97.79)
SYS_CLK_MC2: J5.11 J7.11 | length 47.4
  Top w0.203: J5.11@19.685,38.354 v1(19.685,52.07) ; J7.11@43.077,65.888 v1(43.077,69.088)
  Bottom w0.203: v1(19.685,52.07) 36.703,69.088 v1(43.077,69.088)
VBAT: J5.03 J7.03 | length 54.4
  Top w0.406: J5.03@9.525,38.354 9.525,49.403 31.242,71.12 37.774,71.12 39.877,69.017 J7.03@39.877,65.888
VCCO_MC1: J2.36 J2.56 J3.36 J4.16 | length 79.2
  Top w0.203: v2(52.677,97.79) J2.36@52.677,99.716 ; v2(60.677,97.79) J2.56@60.677,99.716
  Bottom w0.203: J3.36@50.165,124.714 51.877,123.002 51.877,107.381 52.677,106.581 v2(52.677,97.79) 52.677,96.167 53.594,95.25 59.69,95.25 60.677,96.237 v2(60.677,97.79) 60.677,104.111 J4.16@81.28,124.714
VCCO_MC2: J5.35 J6.15 J7.35 J7.55 | length 114.7
  Top w0.203: J5.35@50.165,38.354 37.347,51.172 37.347,60.016 38.799,61.468 50.038,61.468 52.677,64.107 J7.35@52.677,65.888 v1(52.677,69.07) ; J7.55@60.677,65.888 60.692,65.903 60.692,70.598 v1(60.706,70.612)
  Bottom w0.203: v1(52.677,69.07) 54.219,70.612 v1(60.706,70.612) 77.216,70.612 83.566,64.262 83.566,40.64 J6.15@81.28,38.354
XADC_VN: J2.10 J3.10 | length 45
  Top w0.203: v2(42.277,96.774) J2.10@42.277,99.716
  Bottom w0.203: J3.10@17.145,124.714 17.145,117.475 34.036,100.584 40.386,100.584 42.277,98.693 v2(42.277,96.774)
XADC_VP: J2.12 J3.12 | length 41.8
  Top w0.203: v2(43.077,97.79) J2.12@43.077,99.716
  Bottom w0.203: J3.12@19.685,124.714 19.685,116.967 34.798,101.854 40.386,101.854 43.077,99.163 v2(43.077,97.79)
pads on no net: J1_A. J1_B. J1_C. J1_D. J1_E. J1_F. J1_G. J1_H. J2. J7. J10.3 U1_A.7 U1_A.13 U1_A.14 U1_B.7 U1_B.13 U1_B.14 U1_C.7 U1_C.13 U1_C.14 U1_D.7 U1_D.13 U1_D.14 U1_E.7 U1_E.13 U1_E.14 U1_F.7 U1_F.13 U1_F.14 U1_G.7 U1_G.13 U1_G.14 U1_H.7 U1_H.13 U1_H.14

## Polygon pours and split planes (outlines as drawn)
GND on Top "GND_TOP" (solid, pour order 3): 1.27,164.084 150.622,164.084 150.622,1.524 1.27,1.524
5V0 on Top "5V0_TOP" (solid, pour order 2): 40.894,104.648 39.37,103.124 16.764,103.124 1.27,118.618 1.27,164.084 54.102,164.084 54.102,131.064 16.002,131.064 13.462,128.524 13.462,126.746 12.7,125.984 6.35,125.984 5.588,125.222 5.588,123.571 18.923,110.236 39.37,110.236 40.894,108.712
3V3 on Top "3V3_TOP" (solid, pour order 1): 38.799,60.452 38.1,59.753 38.1,55.854 40.386,55.854 40.894,56.362 40.894,60.452
GND on Bottom "GND_TOP" (solid, pour order 4): 1.27,164.084 150.622,164.084 150.622,1.524 1.27,1.524
3V3 on Power Plane (split plane): 151.382,0.51 0.51,0.51 0.51,164.844 151.382,164.844
GND on Ground Plane (split plane): 151.382,0.51 0.51,0.51 0.51,164.844 151.382,164.844

## Silkscreen, mask and mechanical layers (free items; w line width, h text height)
Top Overlay:
  rectangle: 70.592,5.806 83.51,13.509
  rectangle: 93.472,138.811 98.044,141.097
  rectangle: 93.472,143.891 98.044,146.177
  rectangle: 98.298,141.351 102.87,143.637
  rectangle: 93.472,146.431 98.044,148.717
  lines w0.254: 5.172,57.804 80.172,57.804 80.172,107.804 5.172,107.804 5.172,57.804 ; 93.218,138.43 103.124,138.43 103.124,149.098 93.218,149.098 93.218,138.43
  text "Board" at 87.579,151.333 h1.02
  text "ON" at 94.691,150.381 h1.02
  text "OFF" at 99.517,150.381 h1.02
  text "Mode" at 88.087,149.486 h1.02
  text "3" at 89.611,147.015 h1.02
  text "2" at 89.611,144.475 h1.02
  text "1" at 89.814,141.935 h1.02
  text "0" at 89.611,139.395 h1.02
  text "MC1" at 70.053,108.485 h1.02
  text "MC2" at 68.08,56.083 h1.02
  text "Serial #" at 70.51,13.081 h1
  text ".Project_Name" at 11.701,8.128 h2
  text ".Project_Revision" at 11.701,7.526 h1.02
  text "Revision" at 14.147,7.526 h1.02
Board Outline:
  the board outline again, w0.254